# Altium PCB PCB_initial.PcbDoc
Units mil, origin at the board's own origin, x right, y up, seen from the top; angles counter-clockwise.
Board outline 6000 x 4000 mil, 2 copper layers (Top Layer, Bottom Layer); 45 components, 53 nets, 145 pads, 0 vias.
Unrouted connection lines stored in the file: 52.
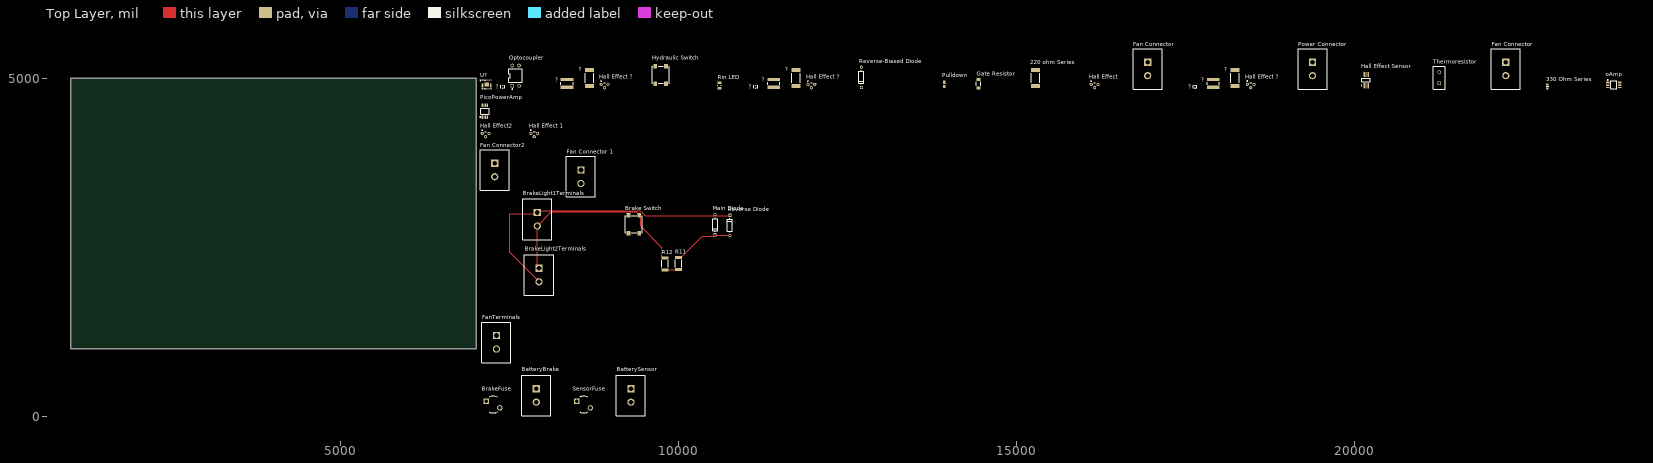
[diagram p0: Top Layer view]
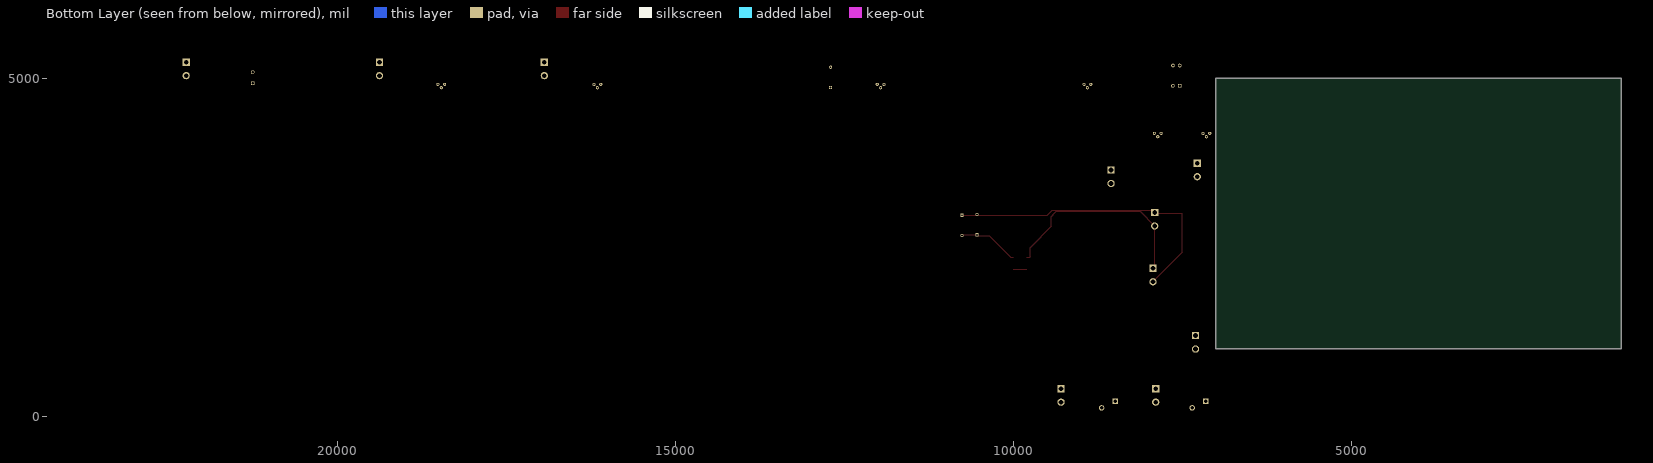
[diagram p1: Bottom Layer view, seen from below]

## Layer stack, top to bottom
Top Solder: solder mask 0.4, Solder Resist, Dk 3.5
Top Layer: signal copper 1.4
Dielectric 1: dielectric 12.6, FR-4, Dk 4.8
Bottom Layer: signal copper 1.4
Bottom Solder: solder mask 0.4, Solder Resist, Dk 3.5

## Board outline
1000,1000 7000,1000 7000,5000 1000,5000

## Design rules (kind name [scope] priority, off if disabled: settings)
AssemblyTestPointUsage [All] p1: isadvanced=TRUE
AssemblyTestpoint [All] p1: isadvanced=TRUE testpointundercomponent=TRUE minsize=40 maxsize=100 preferedsize=60 minholesize=0 maxholesize=40 preferedholesize=32 testpointgrid=1 usegrid=TRUE gridtolerance=0.01 allowsidetop=TRUE allowsidebottom=TRUE
Clearance Clearance_1 [OnMid vs OnMid] p1: gap=10 ignorepadtopadclearanceinfootprint=FALSE sourcerule=41 cellrowname=All cellrowtype=0 cellcolname=All cellcoltype=0 innerlayers=TRUE
Clearance Clearance_2 [(ExistsOnLayer('Top Layer') Or ExistsOnLayer('Bottom Layer')) vs (ExistsOnLayer('Top Layer') Or ExistsOnLayer('Bottom Layer'))] p2: gap=10 ignorepadtopadclearanceinfootprint=FALSE sourcerule=41 cellrowname=All cellrowtype=0 cellcolname=All cellcoltype=0 outerlayers=TRUE
Clearance [All] p3: gap=10 ignorepadtopadclearanceinfootprint=FALSE ismatrix=TRUE
ComponentClearance [All] p1: isadvanced=TRUE gap=10 collisioncheckmode=3 verticalgap=10 showdistances=FALSE
FabricationTestPointUsage [All] p1: isadvanced=TRUE valid=0 allowmultiple=FALSE
FabricationTestpoint [All] p1: isadvanced=TRUE side=3 testpointundercomponent=TRUE minsize=40 maxsize=100 preferedsize=60 minholesize=0 maxholesize=40 preferedholesize=32 testpointgrid=1 allowsidetop=TRUE allowsidebottom=TRUE usegrid=TRUE gridtolerance=0.01
FanoutControl Fanout_BGA [IsBGA] p1: isadvanced=TRUE bgadir=Out bgaviamode=Centered fanoutstyle=Auto fanoutdirection=Alternating viagrid=1 // Fanout_BGA (Default Rule)
FanoutControl Fanout_LCC [IsLCC] p2: isadvanced=TRUE bgadir=Out bgaviamode=Centered fanoutstyle=Auto fanoutdirection=Alternating viagrid=1 // Fanout_LCC (Default Rule)
FanoutControl Fanout_SOIC [IsSOIC] p3: isadvanced=TRUE bgadir=Out bgaviamode=Centered fanoutstyle=Auto fanoutdirection=Alternating viagrid=1 // Fanout_SOIC (Default Rule)
FanoutControl Fanout_Small [(CompPinCount < 5)] p4: isadvanced=TRUE bgadir=Out bgaviamode=Centered fanoutstyle=Auto fanoutdirection=OutThenIn viagrid=1 // Fanout_Small (Default Rule)
FanoutControl Fanout_Default [All] p5: isadvanced=TRUE bgadir=Out bgaviamode=Centered fanoutstyle=Auto fanoutdirection=Alternating viagrid=1 // Fanout_Default (Default Rule)
Height [All] p1: isadvanced=TRUE minheight=0 maxheight=1000 prefheight=500
HoleSize [All] p1: isadvanced=TRUE absolutevalues=TRUE maxlimit=100 minlimit=1 maxpercent=80.000 minpercent=20.000
HoleToHoleClearance [All] p1: isadvanced=TRUE gap=10 allowstackedmicrovias=TRUE
LayerPairs [All] p1: isadvanced=TRUE enforce=TRUE
MinimumSolderMaskSliver [All] p1: isadvanced=TRUE minsoldermaskwidth=10
NetAntennae [All] p1: isadvanced=TRUE netantennaetolerance=0
PasteMaskExpansion [All] p1: isadvanced=TRUE expansion=0
PlaneClearance [All] p1: isadvanced=TRUE clearance=20
PlaneConnect [All] p1: isadvanced=TRUE planeconnectstyle=Relief reliefexpansion=20 reliefentries=4 reliefconductorwidth=10 reliefairgap=10
PolygonConnect [All] p1: connectstyle=Relief reliefconductorwidth=10 reliefentries=4 polygonreliefangle="90 Angle" airgapwidth=10
RoutingCorners [All] p1: isadvanced=TRUE cornerstyle=45-Degree minsetback=100 maxsetback=100
RoutingPriority [All] p1: isadvanced=TRUE routingpriority=0
RoutingVias [All] p1: holewidth=28 width=50 viastyle="Through Hole" minholewidth=28 minwidth=50 maxholewidth=28 maxwidth=50
ShortCircuit [All] p1: isadvanced=TRUE allowed=FALSE
SilkToSilkClearance [All] p1: isadvanced=TRUE silktosilkclearance=10
SilkToSolderMaskClearance [IsPad] p1: isadvanced=TRUE minsilkscreentomaskgap=10 clearancetoexposedcopper=TRUE
SolderMaskExpansion [All] p1: isadvanced=TRUE expansion=4 istentingtop=FALSE
SupplyNets "Schematic Supply Nets_4" [InNet('Brake12V+')] p1: isadvanced=TRUE voltage=0.000
SupplyNets "Schematic Supply Nets_3" [InNet('GND')] p2: isadvanced=TRUE voltage=0.000
SupplyNets "Schematic Supply Nets_2" [InNet('3.3V+')] p3: isadvanced=TRUE voltage=0.000
SupplyNets "Schematic Supply Nets_1" [InNet('5V+')] p4: isadvanced=TRUE voltage=0.000
SupplyNets "Schematic Supply Nets" [InNet('12V+')] p5: isadvanced=TRUE voltage=0.000
UnRoutedNet [All] p1: isadvanced=TRUE
UnpouredPolygon [All] p1: isadvanced=TRUE
Width [All] p1: maxlimit=10 minlimit=10 preferedwidth=10
4 further rules are at their usual default settings.

## Classes and differential pairs
component class Sensors: "5k Pull-up" "5k Pull-Up" "10k - Voltage Divder" "10k Ohm Pull-up" "20k - Voltage Divider" "220 ohm Series" "330 Ohm Series" ? "Bulk Capacitor" D? "Fan Connector" "Gate Resistor" "Hall Effect" "Hall Effect ?" "Hall Effect Sensor" "Hydraulic Switch" MainBattery Mid-Transient oAmp Optocoupler "Pico SC?" "Power Connector" "Power Mosfet" Pulldown R1 R2 "RC Filter ADC" "REG CAP" "Reverse-Biased Diode" "Rin LED" "Small Transient Cap" "Small Transient Cap?" Thermoresistor U?
component class SD_Card: SDR1
component class Pico: "Pi Pico" PicoPowerAmp R5 R6
component class IMU: IMU
component class "Hall Effect": "5.1k Ohm Resistor" "5.1k resistor" "10k Ohm resistor" "10k resistor" "Hall Effect2" "Hall Effect 1"
component class EngineLines: "Engine KillSwitch 1" "Engine KillSwitch 2"
component class "CVT Temperature": "Fan Connector2" "Fan Connector 1" R8 "RC Filter ADC?"
component class BrakeLines: "Brake Switch" BrakeLight1Terminals BrakeLight2Terminals "Main Diode" R11 R12 "Reverse Diode"
component class BilgeFanDriver: D1 FanSwitch FanTerminals R7

## Components (designator, comment, footprint, x,y, rotation, side; value= is the part's Value field where it differs from the comment)
"220 ohm Series" "CRCW2512220RJNEG" FP-CRCW2512-e3-IPC_A 15275,5005 r90 top
"330 Ohm Series" "ERJH3GJ331V" FP-ERJH3G-MFG 22850,4880 r90 top
? "RT0402FRE0720KL" FP-RT0402-MFG 7395,4875 r90 top value=20KΩ
? "CRCW121810K0FKEK" FP-CRCW1218-e3-IPC_B 17905,4925 r90 top
? "CRCW121810K0FKEK" FP-CRCW1218-e3-IPC_B 8345,4925 r90 top
? "CRCW2512220RJNEG" FP-CRCW2512-e3-IPC_A 11735,5005 r90 top
? "RT0402FRE0720KL" FP-RT0402-MFG 17635,4875 r90 top value=20KΩ
? "CRCW121810K0FKEK" FP-CRCW1218-e3-IPC_B 11405,4925 r90 top
? "CRCW2512220RJNEG" FP-CRCW2512-e3-IPC_A 18230,5005 r90 top
? "CRCW2512220RJNEG" FP-CRCW2512-e3-IPC_A 8675,5005 r90 top
? "RT0402FRE0720KL" FP-RT0402-MFG 11135,4875 r90 top value=20KΩ
BatteryBrake "BrakeBattery" FP-350539-1-MFG 7890,309.35 r90 top
BatterySensor "SensorBattery" FP-350539-1-MFG 9290,309.35 r90 top
"Brake Switch" "430473035826" 430473035826 9333.74,2843.11 r90 top
BrakeFuse "02810005H" FP-02810005H-MFG 7250,174.35 r90 top
BrakeLight1Terminals "Brake Light 1" FP-350539-1-MFG 7905,2915 r90 top
BrakeLight2Terminals "Brake Light 2" FP-350539-1-MFG 7930,2090 r90 top
"Fan Connector" "Fan Connector (350539-1)" FP-350539-1-MFG 16935,5140 r90 top
"Fan Connector" "Thermoresistor Connector (350539-1)" FP-350539-1-MFG 22235,5140 r90 top
"Fan Connector2" "Thermoresistor Connector 2" FP-350539-1-MFG 7275,3645 r90 top
"Fan Connector 1" "Thermoresistor Connector 1" FP-350539-1-MFG 8550,3545 r90 top
FanTerminals "Fan Terminal" FP-350539-1-MFG 7300,1094.35 r90 top
"Gate Resistor" "33" FP-RT1206-MFG 14435,4920 r90 top value=33Ω
"Hall Effect" "SS495A" FP-SS495A-MFG 16150,4905 r90 top
"Hall Effect2" "SS495A" FP-SS495A-MFG 7140,4180 r90 top
"Hall Effect 1" "SS495A" FP-SS495A-MFG 7860,4180 r90 top
"Hall Effect ?" "SS495A" FP-SS495A-MFG 18460,4905 r90 top
"Hall Effect ?" "SS495A" FP-SS495A-MFG 8900,4905 r90 top
"Hall Effect ?" "SS495A" FP-SS495A-MFG 11960,4905 r90 top
"Hall Effect Sensor" "ADS1115IDGST" TI-DGS10_M 20165,4975 r90 top
"Hydraulic Switch" "430473035826" 430473035826 9730,5050 r90 top
"Main Diode" "1N4148" FP-017AG-MFG 10535,2835 r90 top
oAmp "TLV2372IDGK" DGK0008A_N 23830,4905 r0 top
Optocoupler "PC817X1J000F" FP-PC817X1J000F-MFG 7585,5040 r90 top
PicoPowerAmp "TLV2372IDGK" DGK0008A_N 7130,4515 r90 top
"Power Connector" "Power Connector (350539-1)" FP-350539-1-MFG 19375,5140 r90 top
Pulldown "100 kOhm" RESC1609X55X30ML10T20 13925,4910 r90 top
R11 "3800K 5% 2010(5025)" RESC2010(5025)_L 9995,2260 r270 top value="3800.00 Ohm"
R12 "10K 5% 2010(5025)" RESC2010(5025)_L 9795,2255 r90 top value="10000.00 Ohm"
"Reverse Diode" "1N4148" FP-017AG-MFG 10755,2825.12 r270 top
"Reverse-Biased Diode" "1N4148" FP-017AG-MFG 12700,5015 r90 top
"Rin LED" "CRCW08051K50JNEA" FP-CRCW0805-e3-MFG 10600,4895 r90 top
SensorFuse "02810005H" FP-02810005H-MFG 8590,174.35 r90 top
Thermoresistor "NTCALUG02A103G" FP-NTCALUG02A103G-MFG 21250,5010 r90 top
U? "ICM-20948" TDK-QFN-24_L 7155,4910 r0 top

## Footprints (in the part's own frame and the unit in brackets; to place one, negate y for a bottom-side part, rotate by r counter-clockwise, add the part's x,y. Pads: shape width x height; smd on the part's side, far side on the other; paste and mask are expansions set on the pad)
430473035826 [mm] "SMD Tact Switch, body 6x6mm"
  rect 1.7x1.4 smd: A1(-3.35,2) A2(3.35,2) B1(-3.35,-2) B2(3.35,-2)
  silkscreen extent -3.2,-3.2 3.2,3.2, body extent -3.6,-3.1 3.6,3.1, height 3.5
DGK0008A_N [mm] "TSOP, 8-Leads, Body 3.1x3.1mm, Pitch 0.65mm, IPC Medium Density"
  rrect22% 1.35x0.45 smd: 1(-2.225,0.975) 2(-2.225,0.325) 3(-2.225,-0.325) 4(-2.225,-0.975) 5(2.225,-0.975) 6(2.225,-0.325) 7(2.225,0.325) 8(2.225,0.975)
  silkscreen extent -2.35,-1.55 1.15,1.9, body extent -2.45,-1.5 2.45,1.5, height 0.94
FP-017AG-MFG [mm]
  rect 1.2x1.2 hole 0.7 paste-2539.97 mask+0: 1(-3.813,0)
  round 1.2 hole 0.7 paste-2539.97 mask+0: 2(3.813,0)
  silkscreen extent -2.68,-0.95 2.68,0.95, body extent -4.51,-1.05 4.51,1.05, height 0.25
FP-350539-1-MFG [mil]
  rect 107.4x107.4 hole 70 paste-99999 mask+0: 1(100,0)
  round 107.4 hole 70 paste-99999 mask+0: 2(-100,0)
  silkscreen extent -300,-215 300,215, body extent -304,-219 304,219, height 10
FP-02810005H-MFG [mil]
  rect 80.06x80.06 hole 52.5 paste-99999 mask+0: 1(50,100)
  round 80.06 hole 52.5 paste-99999 mask+0: 2(-50,-100)
  silkscreen extent -124,-59 124,59, body extent -170,-170 170,170, height 10
FP-CRCW0805-e3-MFG [mm]
  rect 0.95x1.45 smd paste+0 mask+0: 1(-0.975,0) 2(0.975,0)
  silkscreen extent -0.13,-0.7 0.13,0.7, body extent -1.55,-0.82 1.55,0.82, height 0.25
FP-CRCW1218-e3-IPC_B [mil]
  rect 45.51x187.33 smd paste+0 mask+0: 1(-56.15,0) 2(56.15,0)
  silkscreen extent -19,-91 19,91, body extent -89,-104 89,104, height 10
FP-CRCW2512-e3-IPC_A [mil]
  rect 61.22x134.18 smd paste+0 mask+0: 1(-119.12,0) 2(119.12,0)
  silkscreen extent -74,-62 74,62, body extent -169,-87 169,87, height 10
FP-ERJH3G-MFG [mm]
  rect 0.65x0.9 smd paste+0 mask+0: 1(-0.725,0) 2(0.725,0)
  silkscreen extent 0,-0.48 0,0.48, body extent -1.15,-0.58 1.15,0.58, height 0.25
FP-NTCALUG02A103G-MFG [mm]
  rect 1.35x1.35 hole 0.85 paste-2539.97 mask+0: 1(-2.05,0)
  round 1.35 hole 0.85 paste-2539.97 mask+0: 2(2.05,0)
  silkscreen extent -4.35,-2.25 4.35,2.25, body extent -4.45,-2.35 4.45,2.35, height 0.25
FP-PC817X1J000F-MFG [mm]
  rect 1.35x1.35 hole 0.85 paste-2539.97 mask+0: 1(-3.81,1.27)
  round 1.35 hole 0.85 paste-2539.97 mask+0: 2(-3.81,-1.27) 3(3.81,-1.27) 4(3.81,1.27)
  silkscreen extent -5.17,-2.54 2.5,2.54, body extent -4.58,-2.64 4.58,2.64, height 0.25
FP-RT0402-MFG [mm]
  rect 0.5x0.6 smd paste+0 mask+0: 1(-0.5,0) 2(0.5,0)
  silkscreen extent -0.5,-0.71 0.5,0.7, body extent -0.85,-0.4 0.85,0.4, height 0.25
FP-RT1206-MFG [mm]
  rect 1x1.5 smd paste+0 mask+0: 1(-1.6,0) 2(1.6,0)
  silkscreen extent -0.72,-0.85 0.72,0.85, body extent -2.2,-0.95 2.2,0.95, height 0.25
FP-SS495A-MFG [mm]
  round 1.18 hole 0.68 paste-2539.97 mask+0: 1(0.165,1.27) 2(-1.105,0) 3(0.165,-1.27)
  silkscreen extent 0.78,-0.31 1.47,1.42, body extent -1.8,-2.13 0.88,2.13, height 0.25
RESC1609X55X30ML10T20 [mm] "Chip Resistor, 2-Leads, Body 1.60x0.85mm, IPC Low Density"
  rect 1.15x1.05 smd: 1(-0.825,0) 2(0.825,0)
  body extent -0.85,-0.48 0.85,0.48, height 0.55
RESC2010(5025)_L [mm] "Chip Resistor, Body 5.0x2.5mm, IPC High Density"
  rect 1.05x2.6 smd: 1(-2.25,0) 2(2.25,0)
  silkscreen extent -1.35,-1.2 1.35,1.2, body extent -2.6,-1.35 2.6,1.35, height 0.71
TDK-QFN-24_L [mm] "QFN, 24-Leads, Body 3.10x3.10mm, Pitch 0.40mm, Thermal Pad 1.70x1.54mm, IPC High Density"
  oval 0.65x0.2 smd: 1(-1.575,1) 2(-1.575,0.6) 3(-1.575,0.2) 4(-1.575,-0.2) 5(-1.575,-0.6) 6(-1.575,-1) 13(1.575,-1) 14(1.575,-0.6) 15(1.575,-0.2) 16(1.575,0.2) 17(1.575,0.6) 18(1.575,1)
  oval 0.2x0.65 smd: 7(-1,-1.575) 8(-0.6,-1.575) 9(-0.2,-1.575) 10(0.2,-1.575) 11(0.6,-1.575) 12(1,-1.575) 19(1,1.575) 20(0.6,1.575) 21(0.2,1.575) 22(-0.2,1.575) 23(-0.6,1.575) 24(-1,1.575)
  rect 1.7x1.54 smd: 25(0,0)
  silkscreen extent -2.47,-1.7 1.7,1.7, body extent -1.55,-1.55 1.55,1.55, height 1.05
TI-DGS10_M [mm] "SOP, 10-Leads, Body 3x3mm, Pitch 0.5mm, IPC Low Density"
  oval 2x0.3 smd: 1(-2.1,1) 2(-2.1,0.5) 3(-2.1,0) 4(-2.1,-0.5) 5(-2.1,-1) 6(2.1,-1) 7(2.1,-0.5) 8(2.1,0) 9(2.1,0.5) 10(2.1,1)
  silkscreen extent -2.22,-1.55 0.7,1.82, body extent -1.55,-1.55 1.55,1.55, height 1.1

## Part data
"220 ohm Series" ? ? ?: library part CMP-02407-001846-1, "RES Thick Film, 220Ω, 5%, 1W, 200ppm/°C, 2512", Case Code (Imperial)=2512, Case Code (Metric)=6432, Max Operating Temperature=155°C, Max Power Dissipation=1W, Min Operating Temperature=-55°C, Package Quantity=1, Resistance=220R, Temperature Coefficient=200ppm/°C, Tolerance=5%, Voltage Rating=500V, Case/Package=2512, Composition="Thick Film", Contact Plating=Tin, Depth=3.15mm, Features="Automotive AEC-Q200", Height=0.6mm, Lead Free="Lead Free", Length=6.3mm, Military Standard=Not, Mount="Surface Mount", Number of Pins=2, Number of Terminations=2, Packaging="Tape and Reel", Power Rating=1W, Radiation Hardening=No, Termination=SMD/SMT, Voltage Rating (DC)=500V, Weight=0.001429oz, Width=0.124inch
"330 Ohm Series": library part CMP-00287-116338145-1, "ERJH3GJ331V Res 330 Ohm 5% 1/8W 0603", NexarPartId=116338145
? ? ?: library part CMP-2002-02549-2, "RES SMD 20K OHM 1% 1/16W 0402", Manufacturer=Yageo, Package=RT0402, Power Rating=0.063W, Resistance=20KΩ, Temperature="-55°C to +155°C", Temperature Coefficient="50 ppm/°C", Temperature Range High=+155°C, Temperature Range Low=-55°C, Tolerance=0.01, Voltage Rating=50V, Automotive=No, Category=Res, ComponentLink2Description=Datasheet, ComponentLink2URL=http://www.yageo.com/documents/recent/PYu-RT_1-to-0.01_RoHS_L_9.pdf, Composition="Thin Film", Device Class L1="Passive Components", Device Class L2=Resistors, Device Class L3="Chip SMD Resistors", Digikey Description="RES SMD 20K OHM 1% 1/16W 0402", Footprint Url=http://www.yageo.com/exep/pages/download/literatures/PYu-R_Mount_10.pdf, Height=0.35mm, Ipc Land Pattern Name=RESC10050X30, Lead Free=Yes, Manufacturer Part Number=RT0402FRE0720KL, Mouser Description="Res Thin Film 0402 20K Ohm 1% 1/16W ±50ppm/°C Molded SMD SMD Paper T/R", Octopart=https://octopart.com/rt0402fre0720kl-yageo-1412788, RoHS=TRUE, Series=RT
? ? ?: library part CMP-02407-008404-1, "RES Thick Film, 10kΩ, 1%, 1W, 100ppm/°C, 1218", Case Code (Imperial)=1218, Case Code (Metric)=3246, Max Operating Temperature=155°C, Min Operating Temperature=-55°C, Package Quantity=4000, Power Rating=1W, Resistance=10kR, Temperature Coefficient=100ppm/°C, Tolerance=5%, Voltage Rating=200V, Case/Package=1218, Composition="Thick Film", Contact Plating=Tin, Height=0.55mm, Lead Free="Lead Free", Length=3.2mm, Packaging="Tape and Reel", Radiation Hardening=No, Weight=0.001041oz, Width=4.6mm
BatteryBrake BatterySensor BrakeLight1Terminals BrakeLight2Terminals "Fan Connector" "Fan Connector" "Fan Connector2" "Fan Connector 1" FanTerminals "Power Connector": library part CMP-03369-000078-1, "CONN HEADER VERT 2POS 5.08MM", Current Rating=12A, Manufacturer="TE Connectivity", Manufacturer Part Number=350539-1, Temperature="-55°C to +105°C", Temperature Range High=+105°C, Temperature Range Low=-55°C, Voltage Rating=250V, Automotive=No, Category=Conn, ComponentLink2Description=Datasheet, ComponentLink2URL=https://www.te.com/usa-en/product-350539-1.html?te_bu=Cor&te_type=other&te_campaign=oct_glo_cor-oct-global-oth-prtnr-fy19-oct-octo-buy-bom_sma-298_2&elqCampaignId=35216, Conn Gender=Male, Conn Orientation=Vertical, Contact Material=Gold,Nickel, Device Class L1=Connectors, Device Class L2="Headers and Wire Housings", Device Class L3=unset, Digikey Description="CONN HEADER VERT 2POS 5.08MM", Height=0.41inch, Lead Free=Yes, Mouser Description="Pin & Socket Connectors CONN PCM 2 POS TIN", Number Of Contacts=2, Number Of Rows=1, Octopart=https://octopart.com/350539-1-te+connectivity-46510628, Package=350539-1, Pitch=5.08mm, RoHS=TRUE, Standoff Height=0.025inch
"Brake Switch" "Hydraulic Switch": library part CMP-1455-00006-5, "Switch Tactile Spst-no 0.05A 12V", Current Rating=50mA, Insulation Resistance=100MΩ, Max Operating Temperature=85°C, Min Operating Temperature=-40°C, Voltage Rating=12V, Actuator Material="Liquid Crystal Polymer, Polymer", Contact Plating=Silver, Height=3.5mm, Illumination Type=Non-Illuminated, Mechanical Life=500kcycles, Mount="Surface Mount", Packaging="Tape and Reel", RoHS=Compliant, Switch Function=Off-Mom, Switch Travel=250µm, Throw Configuration=SPST
BrakeFuse SensorFuse: library part CMP-08604-000019-1, "FUSE HLDR RADIAL 125V 5A PNL MNT", Ambient Temperature Range High=+100°C, Ambient Temperature Range Low=-40°C, Fuse Current=5A, Manufacturer=Littelfuse, Voltage Rating Ac=125V, Automotive=No, Category=Fuse, ComponentLink2Description=Datasheet, ComponentLink2URL=https://www.littelfuse.com/~/media/electronics/datasheets/fuse_holders/littelfuse_fuse_holder_281_556_557_datasheet.pdf.pdf, Conn Orientation=Vertical, Device Class L1="Circuit Protection", Device Class L2="Fuse Holders", Device Class L3=unset, Digikey Description="FUSE HLDR RADIAL 125V 5A PNL MNT", Height=0.262inch, Lead Free=Yes, Manufacturer Part Number=02810005H, Mouser Description="Fuse Holder Micro Vertical PCB Mount", Number Of Fuses=1, Octopart=https://octopart.com/02810005h-littelfuse-557282, Package=02810005H, RoHS=TRUE, Standoff Height=0.032inch, Voltage Rating Dc=125V
"Gate Resistor": library part CMP-2003-04210-2, "RES SMD 33 OHM 0.1% 1/4W 1206", Manufacturer=Yageo, Manufacturer Part Number=RT1206BRD0733RL, Package=RT1206, Power Rating=0.25W, Resistance=33Ω, Temperature="-55°C to +155°C", Temperature Coefficient="25 ppm/°C", Temperature Range High=+155°C, Temperature Range Low=-55°C, Tolerance=0.005, Voltage Rating=200V, Automotive=No, Category=Res, ComponentLink2Description=Datasheet, ComponentLink2URL=http://www.yageo.com/documents/recent/PYu-RT_1-to-0.01_RoHS_L_9.pdf, Composition="Thin Film", Device Class L1="Passive Components", Device Class L2=Resistors, Device Class L3="Chip SMD Resistors", Digikey Description="RES SMD 33 OHM 0.1% 1/4W 1206", Footprint Url=http://www.yageo.com/exep/pages/download/literatures/PYu-R_Mount_10.pdf, Height=0.65mm, Ipc Land Pattern Name=RESC310160X55, Lead Free=Yes, Mouser Description="Res Thin Film 1206 33 Ohm 0.1% 1/4W ±25ppm/°C Molded SMD SMD Paper T/R", Octopart=https://octopart.com/rt1206brd0733rl-yageo-1483167, RoHS=TRUE, Series=RT
"Hall Effect" "Hall Effect2" "Hall Effect 1" "Hall Effect ?" "Hall Effect ?" "Hall Effect ?": library part CMP-11168-000007-1, "SENSOR HALL ANALOG RADIAL LEAD", Case/Package=TO-92, Input Current=7mA, Leakage Current=10uA, Max Operating Temperature=150°C, Max Output Current=10mA, Max Supply Voltage=10.5V, Min Operating Temperature=-40°C, Min Output Voltage=200mV, Min Supply Voltage=4.5V, Nominal Supply Current=8.7mA, Operating Supply Voltage=9V, Package Quantity=1000, Switching Current=1.5mA, Connector Type=Soldering, Depth=1.6mm, Height=0.063inch, Lead Free="Lead Free", Length=0.159inch, Linearity=-1%, Max Supply Voltage (DC)=10.5V, Max Voltage Rating (DC)=10.5V, Min Supply Voltage (DC)=4.5V, Mount="Through Hole", Number Of Contacts=3, Number of Pins=3, Operating Supply Current=7mA, Output Current=10mA, Output Type=Analog, Output Voltage=200mV, Packaging=Bulk, Radiation Hardening=No, REACH SVHC="No SVHC", Response Time=3us, Sensing Method="Hall Effect", Sensitivity=0.125mV/g, Termination=SMD/SMT, Type="Integrated Circuit (IC)", Width=0.118inch
"Hall Effect Sensor": library part CMP-0003-00378-2, "16-Bit ADC with Integrated Multiplexer, PGA, Comparator, Oscillator, and Reference, -40 to 125 degC, 10-pin SOP (DGS10), Green (RoHS & no Sb/Br)", Analog Voltage AV/DD(Max)(V)=5.5, Analog Voltage AV/DD(Min)(V)=2, Manufacturer="Texas Instruments", # Input Channels=4, Architecture=Delta-Sigma, Code_JEDEC=MO-153, ComponentLink1Description="Manufacturer URL", ComponentLink1URL=http://www.ti.com/, ComponentLink2Description=Datasheet, ComponentLink2URL=http://www.ti.com/general/docs/lit/getliterature.tsp?genericPartNumber=ADS1115&fileType=pdf, ComponentLink3Description="Package Specification", ComponentLink3URL=http://www.ti.com/lit/ml/mpds035b/mpds035b.pdf, DatasheetVersion=SBAS444B, Digital Supply(Max)(V)=5.5, Digital Supply(Min)(V)=2, Eco-Plan="Green (RoHS & no Sb/Br)", INL(Max)(+/-LSB)=1, Interface="Serial I2C", Mounting Technology="Surface Mount", PackageDescription="10-Pin Plastic Small Outline, Body 3 x 3 mm, Pitch 0.5 mm", PackageReference=DGS10, PackageVersion="4073272/C, 02/2004", PartNumber=ADS1115IDGST, Resolution(Bits)=16, Sample Rate (max)(SPS)=860, SubFamily="Precision ADC (<=10MSPS)"
"Main Diode" "Reverse Diode" "Reverse-Biased Diode": library part CMP-07163-000046-1, "DIODE GEN PURP 100V 200MA DO35", Average Rectified Current=200mA, Capacitance=4pF, Case/Package=DO-35, Current=4A, Forward Current=300mA, Forward Voltage=1V, Max Forward Surge Current (Ifsm)=1A, Max Operating Temperature=175°C, Max Power Dissipation=500mW, Max Repetitive Reverse Voltage (Vrrm)=100V, Max Reverse Current=5uA, Min Operating Temperature=-65°C, Package Quantity=2000, Contact Plating=Tin, Current Rating=200mA, Diameter=1.91mm, Element Configuration=Single, Height=4.56mm, Lead Free="Lead Free", Length=4.56mm, Max Reverse Voltage (DC)=100V, Max Surge Current=4A, Mount="Through Hole", Number of Pins=2, Output Current=200mA, Outside Diameter=1.85mm, Packaging=Bulk, Peak Non-Repetitive Surge Current=4A, Polarity=Standard, Power Dissipation=500mW, Radiation Hardening=No, REACH SVHC="No SVHC", Recovery Time=4ns, Reverse Recovery Time=4ns, Reverse Voltage=100V, Series=-, Voltage=100V, Voltage Rating (DC)=100V, Weight=0.01lb, Width=1.91mm
oAmp PicoPowerAmp: library part CMP-0272-03409-3, "550 uA/Ch, 3 MHz, RRIO Operational Amplifier, 2.7 to 16 V, -40 to 125 degC, 8-pin SOP (DGK8), Green (RoHS & no Sb/Br)", Manufacturer="Texas Instruments", Rating=Catalog, Total Supply Voltage(Max)(+5V is 5, +/-5V is 10)=16, Total Supply Voltage(Min)(+5V is 5, +/-5V is 10)=2.7, CMRR(Min)(dB)=50, Code_JEDEC=MO-187, ComponentLink1Description="Manufacturer URL", ComponentLink1URL=http://www.ti.com/, ComponentLink2Description=Datasheet, ComponentLink2URL=http://www.ti.com/lit/ds/symlink/tlv2372.pdf, ComponentLink3Description="Package Specification", ComponentLink3URL=http://www.ti.com/litv/pdf/mpds028d, DatasheetVersion=SLOS270D, Eco-Plan="Green (RoHS & no Sb/Br)", GBW(Typ)(MHz)=3, IIB(Max)(pA)=60, Iq per channel(Max)(mA)=0.9, Mounting Technology="Surface Mount", Number of Channels=2, Offset Drift(Typ)(uV/C)=2, PackageDescription="8-Pin Thin Small Outline, Body 3 x 3 mm, Pitch 0.65 mm", PackageReference=DGK0008A, PackageVersion="4073329/E, 05/2006", Packing=TUBE, PartNumber=TLV2372IDGK, Slew Rate(Typ)(V/us)=2.4, Sub Family="Low Supply Voltage Amplifier (<=2.7V), Precision Amplifier", Vio (25C)(Max)(mV)=4.5
Optocoupler: library part CMP-65434-000003-1, "OPTOISOLATOR 5KV TRANS 4DIP", Case/Package=DIP, Collector Emitter Breakdown Voltage=80V, Collector Emitter Saturation Voltage=200mV, Current Transfer Ratio=600%, Forward Current=50mA, Forward Voltage=1.4V, Input Current=20mA, Isolation Voltage=5kV, Max Operating Temperature=100°C, Max Power Dissipation=200mW, Min Operating Temperature=-30°C, Package Quantity=2000, Reverse Breakdown Voltage=6V, Collector Emitter Voltage (VCEO)=80V, Fall Time=18000ns, Max Collector Current=50mA, Max Input Current=50mA, Mount="Through Hole", Number of Channels=1, Number of Elements=1, Number of Pins=4, Output Current per Channel=50mA, Output Voltage=80V, Packaging=Sleeve, Power Dissipation=200mW, Radiation Hardening=No, Rise Time=18000ns
Pulldown: library part CMP-2000-03685-1, Manufacturer="Vishay Dale", Part Number=TNPW0603100KBEEA
R11: library part CMP-1017-00098-1, "3800K 0.75W 5% 2010 (5025 Metric)  SMD", Case-EIA=2010, Case-Metric=5025, Power="0.75 W", Tolerance="5 %", Technology=SMT
R12: library part CMP-1017-00098-1, "10K 0.75W 5% 2010 (5025 Metric)  SMD", Case-EIA=2010, Case-Metric=5025, Power="0.75 W", Tolerance="5 %", Technology=SMT
"Rin LED": library part CMP-2001-04316-2, "RES Thick Film, 1.5kΩ, 5%, 0.125W, 200ppm/°C, 0805", Case Code (Imperial)=0805, Case Code (Metric)=2012, Max Operating Temperature=155°C, Min Operating Temperature=-55°C, Package Quantity=5000, Power Rating=125mW, Resistance=1.5kR, Temperature Coefficient=200ppm/°C, Tolerance=5%, Voltage Rating=150V, Case/Package=0805, Composition="Thick Film", Contact Plating=Tin, Depth=1.25mm, Height=0.45mm, Lead Free="Lead Free", Length=2mm, Military Standard=Not, Packaging="Tape and Reel", Radiation Hardening=No, Termination=SMD/SMT, Voltage Rating (DC)=150V, Weight=0.000194oz, Width=1.25mm
Thermoresistor: library part CMP-02404-000019-1, "THERM NTC 10KOHM 3984K RING LUG", Max Operating Temperature=125°C, Max Power Dissipation=100mW, Min Operating Temperature=-55°C, Package Quantity=500, Resistance=10kR, Resistance Tolerance=2%, Accuracy=0.5%, Contact Plating=Tin, Depth=4.1mm, Length=8.5mm, Mount="Free Hanging", Number of Pins=2, Packaging=Bulk, Radiation Hardening=No, RoHS Compliant=Yes, Series="Automotive, AEC-Q200, NTCA", Termination=Wire, Tolerance=2%
U?: library part CMP-2000-07532-1, "World’s Lowest Power 9-Axis MEMS MotionTracking(TM) Device, 1.71 to 3.6 V, -40 to 85 degC, 24-Pin QFN, RoHS, Tape and Reel", Manufacturer=TDK, Package Description="24-Pin Quad Flat No-lead Package, Body 3 x 3 mm, Pitch 0.4 mm", Package Reference=QFN-24, Datasheet URL=https://www.invensense.com/wp-content/uploads/2016/06/DS-000189-ICM-20948-v1.3.pdf, Datasheet Version="Rev. 1.3, 06/2017", Manufacturer URL=http://www.tdk.com/, Mounting Technology=SurfaceMount

## Nets (pads, with @x,y where several pads share a name; then routed paths per layer and width w, separated by ;. In a path a pad name is that pad's centre, name@x,y a point inside that pad or via, vN(x,y) a via of type N, cw(c..) or ccw(c..) an arc to the next point about the centre after c; other vN are vias at no path point)
3.3V+: 
3v3_OUT: "Hall Effect Sensor.8" U?.8 U?.9 U?.13
5V+: "Hall Effect2.1" "Hall Effect 1.1" PicoPowerAmp.1 PicoPowerAmp.2
12V+: FanTerminals.1 PicoPowerAmp.8 SensorFuse.1 | length 68.7
  Top Layer w10: FanTerminals.1 FanTerminals.1@7348.58,1145.77
AIN0: "Hall Effect Sensor.4" ?.2@18230,5124.12
AIN1: "220 ohm Series.2" "Hall Effect Sensor.5"
AIN2: "Hall Effect Sensor.6" ?.2@11735,5124.12
AIN3: "Hall Effect Sensor.7" ?.2@8675,5124.12
B12V+: "Fan Connector.1"@16935,5240 "Hydraulic Switch.A1" "Power Connector.1" oAmp.8
Brake12V+: "Brake Switch.A1" BrakeFuse.1
FAN_TO_SWITCH: "Fan Connector.2"@16935,5040
GND: "Fan Connector2.1" "Hall Effect2.2" "Hall Effect 1.2" "Hall Effect ?.2" "Hall Effect Sensor.1" "Hall Effect Sensor.3" "Hall Effect.2" "Main Diode.1" "Power Connector.2" "Reverse Diode.2" "Reverse-Biased Diode.2" ?.1@7395,4855.31 ?.1@11135,4855.31 ?.1@17635,4855.31 BatteryBrake.2 BatterySensor.2 oAmp.4 Optocoupler.2 Optocoupler.3 PicoPowerAmp.4 R11.1 U?.18 U?.25 | length 903.4
  Top Layer w10: R11.1 10025.51,2348.58 10343.19,2666.26 10516.38,2666.26 10535,2684.88 10544.88,2675 10755,2675
GND_Thermo: "Fan Connector.2"@22235,5040 Thermoresistor.2
GP12: "Gate Resistor.1"
"GP27 - ADC": "330 Ohm Series.1"
"GP-13 INPUT": Optocoupler.4
"GP-28 ADC": 
"Net5.1k Ohm Resistor_1": "Hall Effect 1.3"
"Net5.1k Ohm Resistor_2": 
"Net5.1k resistor_1": "Hall Effect2.3"
"Net5.1k resistor_2": 
"Net10k - Voltage Divder_1": "Hall Effect.3"
"Net10k - Voltage Divder_2": "220 ohm Series.1"
Net?_1: "Hall Effect ?.3"@8950,4911.5 ?.1@8345,4868.85
NetBatteryBrake_1: BatteryBrake.1 BrakeFuse.2
NetBatterySensor_1: BatterySensor.1 SensorFuse.2
"NetBrake Switch_B2": "Brake Switch.B2" BrakeLight1Terminals.2 BrakeLight2Terminals.1 R12.2 | length 3060.5
  Top Layer w10: BrakeLight2Terminals.1 7905,2215 BrakeLight1Terminals.2 8113.46,3023.46 9369.92,3023.46 9412.48,2980.91 9412.48,2975 9435.04,2952.44 9435.04,2809.78 9748.82,2496 9748.82,2359.25 9764.49,2343.58 R12.2
NetBrakeLight1Terminals_1: "Main Diode.2" "Reverse Diode.1" BrakeLight1Terminals.1 BrakeLight2Terminals.2 | length 4501.5
  Top Layer w10: BrakeLight2Terminals.2 7495,2425 7495,2994.14 7500.86,3000 7890,3000 BrakeLight1Terminals.1 7933.46,3043.46 9426.25,3043.46 9504.72,2965 10030,2965 10744.76,2965 10755,2975.24
NetD1_2: FanTerminals.2
"NetEngine KillSwitch 1_1": 
"NetEngine KillSwitch 1_2": 
"NetFan Connector2_2": "Fan Connector2.2" "Fan Connector 1.2"
"NetFan Connector 1_1": "Fan Connector 1.1"
NetFanSwitch_2: 
"NetGate Resistor_2": "Gate Resistor.2" Pulldown.1
"NetHydraulic Switch_B2": "Hydraulic Switch.B2" "Rin LED.1"
NetIMU_4: 
NetIMU_5: 
NetoAmp_3: oAmp.3
NetOptocoupler_1: "Reverse-Biased Diode.1" "Rin LED.2" Optocoupler.1
"NetPi Pico_4": 
"NetPi Pico_5": 
"NetPi Pico_6": 
"NetPi Pico_7": 
"NetPi Pico_14": R11.2 R12.1 | length 202.1
  Top Layer w10: R12.1 9990,2166.42 R11.2
"NetPi Pico_29": 
"NetPi Pico_32": 
NetPicoPowerAmp_3: PicoPowerAmp.3
NetPicoPowerAmp_6: PicoPowerAmp.6 PicoPowerAmp.7
"NetREG CAP_2": U?.10
SCL: "Hall Effect Sensor.10" U?.23
SDA: "Hall Effect Sensor.9" U?.24
Thermoresistor: "330 Ohm Series.2" "Fan Connector.1"@22235,5240 Thermoresistor.1
pads on no net: "Brake Switch.A2" "Brake Switch.B1" "Hall Effect ?.1" "Hall Effect ?.3"@12010,4911.5 "Hall Effect ?.3"@18510,4911.5 "Hall Effect Sensor.2" "Hall Effect.1" "Hydraulic Switch.A2" "Hydraulic Switch.B1" ?.1@8675,4885.88 ?.1@11405,4868.85 ?.1@11735,4885.88 ?.1@17905,4868.85 ?.1@18230,4885.88 ?.2@7395,4894.69 ?.2@8345,4981.15 ?.2@11135,4894.69 ?.2@11405,4981.15 ?.2@17635,4894.69 ?.2@17905,4981.15 oAmp.1 oAmp.2 oAmp.5 oAmp.6 oAmp.7 PicoPowerAmp.5 Pulldown.2 U?.1 U?.2 U?.3 U?.4 U?.5 U?.6 U?.7 U?.11 U?.12 U?.14 U?.15 U?.16 U?.17 U?.19 U?.20 U?.21 U?.22